# Altium PCB recovery.PcbDoc (part 2 of 2)
Units mm, origin at the board's own origin, x right, y up, seen from the top; angles counter-clockwise.
Board outline 117.35 x 49.91 mm, 2 copper layers (Top Layer, Bottom Layer); 218 components, 132 nets, 666 pads, 35 vias.
Unrouted connection lines stored in the file: 377.
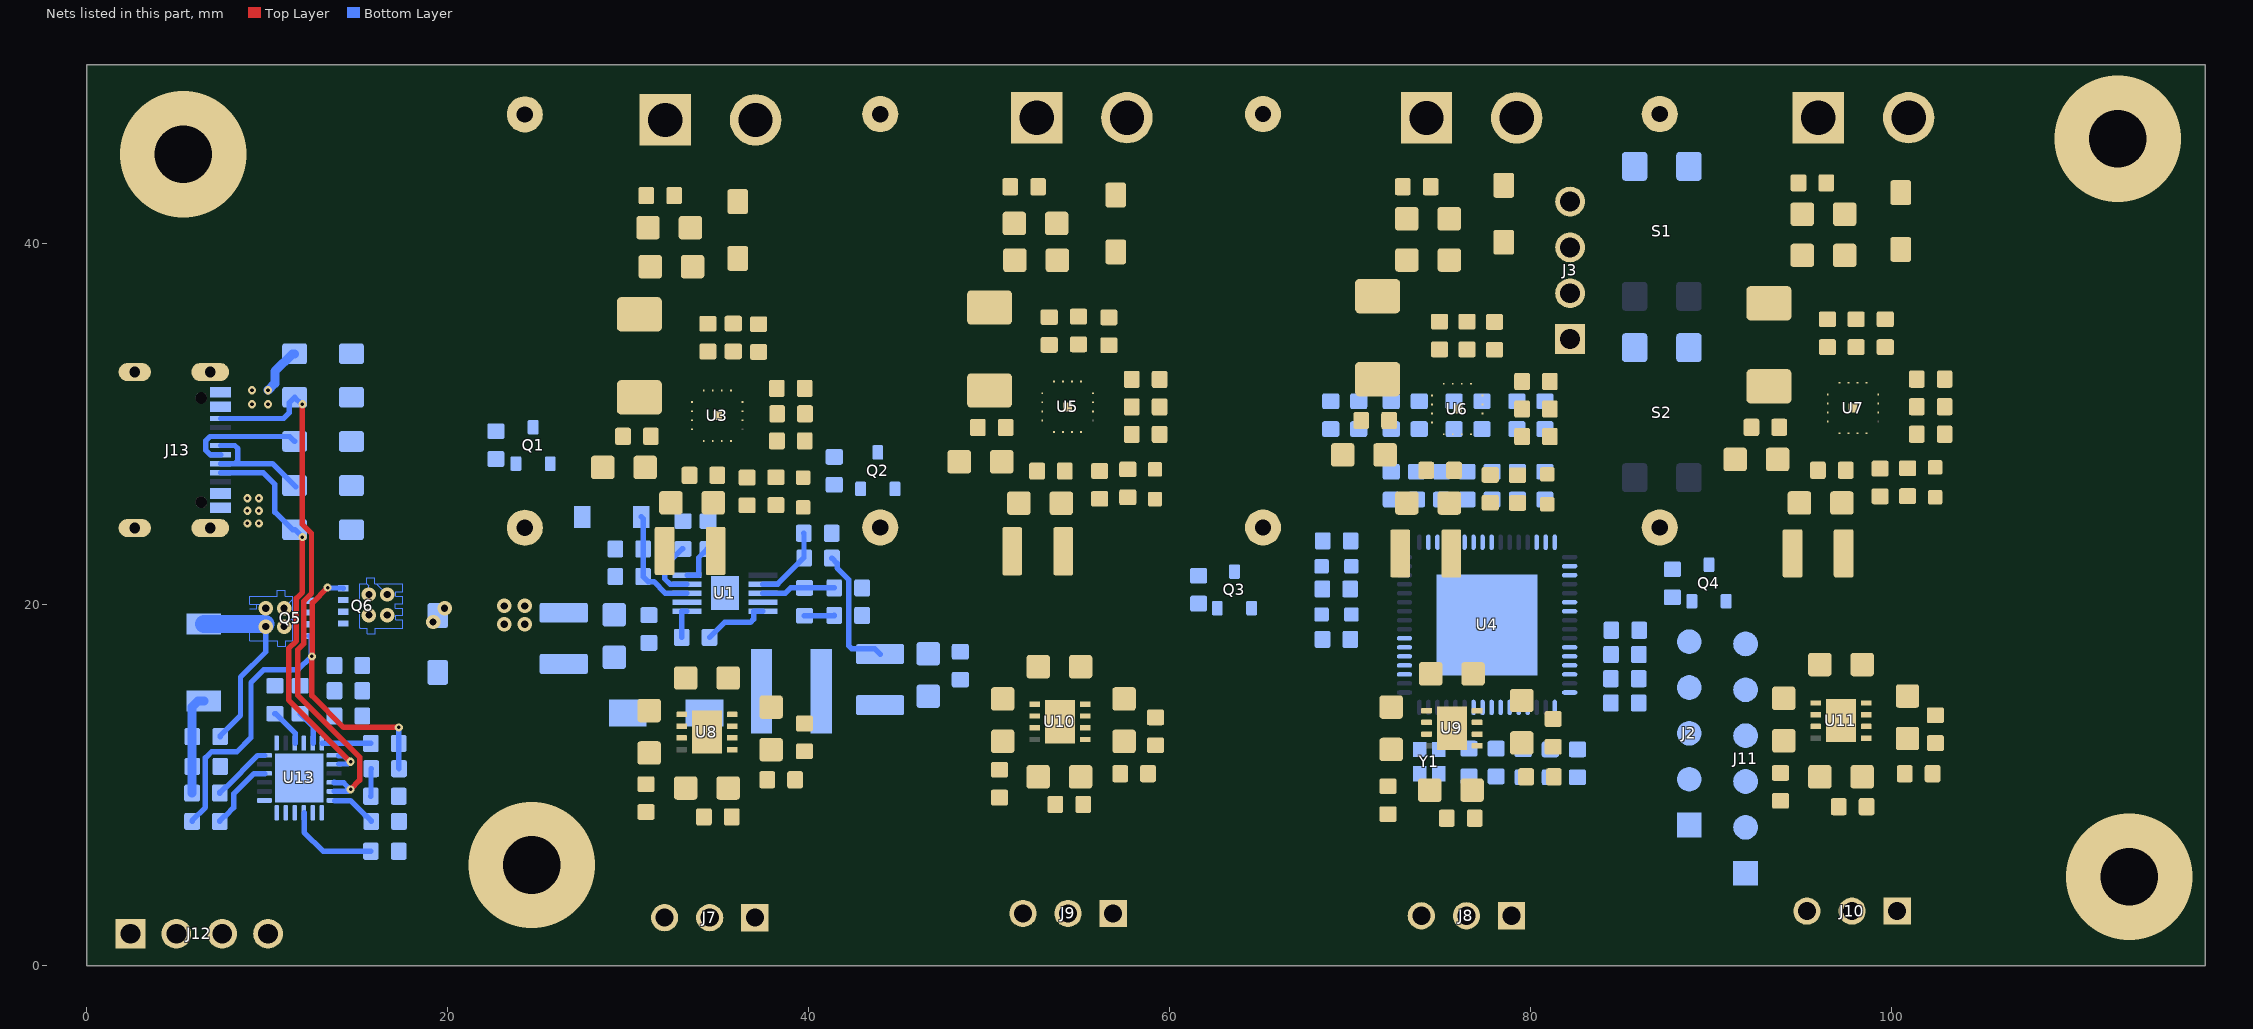
[diagram p2: the nets of this part, all layers, seen from the top]

## Footprints (in the part's own frame and the unit in brackets; to place one, negate y for a bottom-side part, rotate by r counter-clockwise, add the part's x,y. Pads: shape width x height; smd on the part's side, far side on the other; paste and mask are expansions set on the pad) (continued)
TRANS_AONR21321#2 [mm]
  rect 0.6x0.35 smd: 1(-1.55,0.975) 2(-1.55,0.325) 3(-1.55,-0.325) 4(-1.55,-0.975)
  round 0.025 smd: 5(0.558,-0.003)
  Top Layer region: -0.637,-1.231 -0.233,-1.231 -0.233,-1.555 0.209,-1.555 0.209,-1.231 0.209,-1.23 1.749,-1.23 1.749,-0.775 1.352,-0.775 1.352,-0.524 1.748,-0.524 1.748,-0.125 1.346,-0.125 1.346,0.126 1.747,0.126 1.747,0.525 1.352,0.525 1.352,0.772 1.747,0.772 1.753,0.778 1.753,1.225 0.216,1.225 0.216,1.225 0.216,1.55 -0.225,1.55 -0.225,1.225 -0.63,1.225 -0.637,1.218
  Top Layer lines w0.01: -0.127,-0.635 -0.127,-1.125 -0.233,-1.231 ; 0.209,-1.231 0.209,-1.555 -0.233,-1.555 -0.233,-1.231 ; 0.889,-0.635 0.294,-1.23 0.209,-1.23 1.746,-1.23 ; 1.749,-1.23 1.749,-0.775 1.352,-0.775 1.352,-0.524 1.748,-0.524 1.748,-0.125 1.346,-0.125 1.346,0.126 1.747,0.126 1.747,0.525 1.352,0.525 1.352,0.772 1.747,0.772 1.753,0.778 1.753,1.225 0.216,1.225 ; -0.63,1.225 -0.225,1.225 ; -0.63,1.225 -0.637,1.218 -0.637,-1.231 -0.233,-1.231 ; -0.63,1.225 -0.225,1.225 ; -0.225,1.225 -0.225,1.55 0.216,1.55 0.216,1.225 ; 0.216,1.225 0.216,1.225
  silkscreen extent -2.16,-1.55 1.55,1.55, body extent -1.65,-1.55 1.55,1.55, height 0.9
TRANS_SS8050-G [mm]
  rrect25% 0.8x0.6 smd: 1(-1.01,0.95) 2(-1.01,-0.95) 3(1.01,0)
  silkscreen extent -1.4,-1.45 0.65,1.91, body extent -1.2,-1.45 1.2,1.45, height 1.14
XGL5050 [mm]
  rect 1.18x4.7 smd: 1(-1.655,0) 2(1.655,0)
  silkscreen extent -2.64,-2.74 2.64,2.74, body extent -2.64,-2.75 2.64,2.73, height 5.2
XTAL_ECS-240-8-37CKM [mm]
  rect 0.85x0.75 smd paste+0 mask+0.102: 1(-0.675,-0.525) 2(0.675,-0.525) 3(0.675,0.525) 4(-0.675,0.525)
  silkscreen extent -1.8,-0.55 -1.6,-0.35, body extent -1,-0.8 1,0.8, height 0.55

## Part data
C1 C5 C11 C36 C46 C56: library part "Capacitor 22uF 1210", "22uF 50V 1210"
C2 C6 C12 C16 C17 C35 C41 C42 C45 C51 C52 C55 C61 C62 C64 C65 C66 C67 C68 C69 C70 C71 C72 C73 C74 C75 C76 C77 C78 C79: library part "Capacitor 10uF 0805", "10uF 50V 0805"
C3 C4 C7 C8 C9 C10 C13 C19 C21 C34 C39 C44 C49 C54 C59 C80 C85 C89 C90: library part "Capacitor 100nF 0603", "100nF 50V 0603"
  C80 C85 C89 C90: MP=KGF15AR71H104KM
C14 C38 C48 C58: library part "Capacitor 470pF 0603", "470pF 50V 0603"
C15 C37 C47 C57: library part "Capacitor 1nF 0603", "1nF 50V 0603"
C18 C43 C53 C63: library part "Capacitor 220nF 0603", "220nF 50V 0603"
C20 C40 C50 C60: library part "Capacitor 4.7uF 0805", "4.7uF 50V 0805"
C22 C23 C24 C25 C26 C27 C28 C29 C32 C33 C86: library part "Capacitor 1uF 0603", "1uF 50V 0603"
C30 C31: library part "Capacitor 15pF 0603", "15pF 50V 0603", MP=KAM15AR71H103MT
C87 C88: library part "Capacitor 10uF 0603", "10uF 10V 0603"
D1: "1A, 40V, Schottky Rectifier", Package=None, Availability=Unavailable, MP=SS14, Price=None
D2 D4 D5 D6 D8 D10: library part "LED 0603", "1.6x0.8mm Smd Chip Led Lamp", Package="0603 Kingbright", Availability="In Stock", Check_prices=https://www.snapeda.com/parts/KPT-1608ZGC/Kingbright/view-part/?ref=eda, MF=Kingbright, MP=KPT-1608ZGC, Price=None, SnapEDA_Link=https://www.snapeda.com/parts/KPT-1608ZGC/Kingbright/view-part/?ref=snap
D3 D7 D9 D11: "1-channel  50V ultra-low-capacitance IEC ESD protection diode", Package="X1SON-2 Texas Instruments", Availability=Good, DigiKey-Purchase-URL=https://snapeda.com/shop?store=DigiKey&id=383548, MF="Texas Instruments", Mouser-Purchase-URL=https://snapeda.com/shop?store=Mouser&id=383548, MP=TPD1E05U06DPYR, Price=None, SnapEDA_Link=https://www.snapeda.com/parts/TPD1E05U06DPYR/Texas%20Instruments/view-part/383548/?ref=snap, Texas_Instruments-Purchase-URL=https://snapeda.com/shop?store=Texas+Instruments&id=383548
D12: "5A, 40V, Schottky Rectifier", Package="SOD-128-2 Taiwan Semiconductor", Availability="In Stock", Check_prices=https://www.snapeda.com/parts/SS54FSH/Taiwan+Semiconductor/view-part/?ref=eda, MF="Taiwan Semiconductor", MP=SS54FSH, Price=None, SnapEDA_Link=https://www.snapeda.com/parts/SS54FSH/Taiwan+Semiconductor/view-part/?ref=snap
D18 D19 D20 D21: "1-channel  24V ultra-low-capacitance IEC ESD protection diode", Package="X1SON-2 Texas Instruments", Availability=Good, DigiKey-Purchase-URL=https://snapeda.com/shop?store=DigiKey&id=383548, MF="Texas Instruments", Mouser-Purchase-URL=https://snapeda.com/shop?store=Mouser&id=383548, MP=TPD1E05U06DPYR, Price=None, SnapEDA_Link=https://www.snapeda.com/parts/TPD1E05U06DPYR/Texas%20Instruments/view-part/383548/?ref=snap, Texas_Instruments-Purchase-URL=https://snapeda.com/shop?store=Texas+Instruments&id=383548
D22 D23: "1-channel  64V ultra-low-capacitance IEC ESD protection diode", Package="X1SON-2 Texas Instruments", Availability=Good, DigiKey-Purchase-URL=https://snapeda.com/shop?store=DigiKey&id=383548, MF="Texas Instruments", Mouser-Purchase-URL=https://snapeda.com/shop?store=Mouser&id=383548, MP=TPD1E05U06DPYR, Price=None, SnapEDA_Link=https://www.snapeda.com/parts/TPD1E05U06DPYR/Texas%20Instruments/view-part/383548/?ref=snap, Texas_Instruments-Purchase-URL=https://snapeda.com/shop?store=Texas+Instruments&id=383548
J1 J4 J5 J6: "Socket; DC supply; XT30; male; PIN: 2; on PCBs; THT; straight, Colour: yellow", Package=None, Check_prices=https://www.snapeda.com/parts/XT30PW-M/AMASS/view-part/?ref=eda, MF=AMASS, MP=XT30PW-M, SnapEDA_Link=https://www.snapeda.com/parts/XT30PW-M/AMASS/view-part/?ref=snap
J2: library part "5pin 2.54 SAMTEC", "2.54mm", Package=None, Availability=Unavailable, MF="{'manufacturer': 'TE Connectivity'}", MP=534237-4, Price=None
J3 J12: library part "4 pin header", "CONN HEADER VERT 4POS 2.54MM", Manufacturer_Name=SAMTEC, Datasheet Link=http://suddendocs.samtec.com/catalog_english/mtsw.pdf, Geometry.Height=8.64mm, Manufacturer_Part_Number=MTSW-104-07-G-S-000
  J12: MP="4 pin header"
J7 J8 J9 J10: "Connector Header Through Hole 3 position 0.098 (2.50mm)", Package=None, Check_prices=https://www.snapeda.com/parts/B3B-XH-A(LF)(SN)/JST/view-part/?ref=eda, MF="JST Sales", MP=B3B-XH-A(LF)(SN), SnapEDA_Link=https://www.snapeda.com/parts/B3B-XH-A(LF)(SN)/JST/view-part/?ref=snap
J11: library part "6 pin header", "CONN HEADER VERT 6POS 2.54MM", Manufacturer_Name=SAMTEC, Manufacturer_Part_Number=MTSW-104-07-G-S-000, Datasheet Link=http://suddendocs.samtec.com/catalog_english/mtsw.pdf, Geometry.Height=8.64mm, MP="4 pin header"
J13: Package=None, Availability=Unavailable, MF="{'manufacturer': u'GCT'}", MP=USBC-4105-GF-A, Price=None
L1: "10uH Shielded Molded Inductor 2.5 A", Manufacturer_Name=COILCRAFT, Manufacturer_Part_Number=XGL5050-153MEC, Datasheet Link=https://www.coilcraft.com/getmedia/348b2df6-54b3-4579-8737-e8367b6fa367/xgl5050.pdf, Geometry.Height=5.1mm
L2 L3 L4 L5: library part "1uH 9A", "1uH 9A  8.9mΩ"
Q1 Q2 Q3 Q4: "N-Channel 50 V 220mA (Ta) 350mW (Ta) Surface Mount SOT-23-3", Package="SOT-23-3 Motorola", Check_prices=https://www.snapeda.com/parts/BSS138/Onsemi/view-part/?ref=eda, MF=onsemi, MP=BSS138, SnapEDA_Link=https://www.snapeda.com/parts/BSS138/Onsemi/view-part/?ref=snap
Q5 Q6: "P-Channel 40 V 20A Surface", Package="SOT-23-3 Motorola", Check_prices=https://www.snapeda.com/parts/BSS138/Onsemi/view-part/?ref=eda, MF=onsemi, MP=BSS138, SnapEDA_Link=https://www.snapeda.com/parts/BSS138/Onsemi/view-part/?ref=snap
R1 R2 R3 R4 R5 R6 R52: library part "Resistor 100k 0603", "100k 0603"
  R52: MP=RCG0603100KFKEA
R7 R8 R9 R10 R11 R12 R13 R14 R15 R16 R17 R18 R19 R20 R21 R22 R23 R24 R25 R26 R27 R28 R29 R30 R31 R32 R33 R34 R35 R36 R37 R38 R39 R40 R41 R42 R43 R44 R45 R46 R47 R48 R49 R50 R51 R63 R64 R65 R66 R67 R68 R69 R70 R71 R77: library part "Resistor 10k 0603", "10k 0603"
  R77: MP=RE0603FRE1310KL
R53 R54 R59 R60: library part "15R 3W THT", "15R 3W THT"
R55 R56 R61 R62: library part CMP-009-00225-1, "10k 0603", Component Type=Standard, Design Item ID="Resistor 10k 0603", Pins=2, Source=0603.SchLib
R57: library part "Resistor 22.1K 0603", "22.1K 0603"
R58 R79: library part "Resistor 1k 0603", "1k 0603"
R72: library part "Resistor 100R 0603", "100R 0603", Manufacturer_Part_Number=RE0603FRE07100RL, MP=RE0603FRE07100RL
R78: library part "Resistor 470R 0603", "470R 0603"
S1 S2: "Tactile Switch SPST-NO Top Actuated Surface Mount", Package=None, Availability="In Stock", Check_prices=https://www.snapeda.com/parts/TL3305BF160QG/E-Switch/view-part/?ref=eda, MF=E-Switch, MP=TL3305BF160QG, Price=None, Purchase-URL=https://pricing.snapeda.com/search/part/TL3305BF160QG/?ref=eda, SnapEDA_Link=https://www.snapeda.com/parts/TL3305BF160QG/E-Switch/view-part/?ref=snap
U1: "3.5V to 60V Input, 1.5A Step-Down Converter with Eco-Mode 10-HVSSOP -40 to 150", Package="HVSSOP-10 Texas Instruments", Check_prices=https://www.snapeda.com/parts/TPS54160DGQRG4/Texas+Instruments/view-part/?ref=eda, MF="Texas Instruments", MP=TPS54160DGQRG4, SnapEDA_Link=https://www.snapeda.com/parts/TPS54160DGQRG4/Texas+Instruments/view-part/?ref=snap
U2: "Zener Diode 4.7V 500 mW ±2% Surface Mount SOD-123", Package="SOD-123-2 ON Semiconductor", Check_prices=https://www.snapeda.com/parts/SZMMSZ5248CT1G/Onsemi/view-part/?ref=eda, MF="ON Semiconductor", MP=SZMMSZ5248CT1G, SnapEDA_Link=https://www.snapeda.com/parts/SZMMSZ5248CT1G/Onsemi/view-part/?ref=snap
U3 U5 U6 U7: "TI Standalone 17-V, 3A 1-2 cell buck battery charger", Package="WFQFN-16 Texas Instruments", Check_prices=https://www.snapeda.com/parts/BQ25306RTER/Texas+Instruments/view-part/?ref=eda, MF="Texas Instruments", MP=BQ25306RTER, SnapEDA_Link=https://www.snapeda.com/parts/BQ25306RTER/Texas+Instruments/view-part/?ref=snap
U4: "8-bit AVR Microcontroller, 2.7-5.5V, 32KB Flash, 1KB EEPROM, 2KB SRAM, 64-pin MLF, Industrial Grade (-40°C to 85°C)", Code_JEDEC=MO-220-VMMD, ComponentLink1Description="Manufacturer URL", ComponentLink1URL=http://www.atmel.com/, ComponentLink2Description="ATmega329/3290/649/6490 Datasheet", ComponentLink2URL=http://www.atmel.com/dyn/resources/prod_documents/doc2552.pdf, ComponentLink3Description="ATmega329/3290/649/6490 Summary", ComponentLink3URL=http://www.atmel.com/dyn/resources/prod_documents/2552S.pdf, DatasheetVersion="revK, Apr-2011", PackageDescription="64-Pin Micro Lead Frame Package (MLF), 9 x 9 x 1.0 mm Body, 0.5 mm Pitch, 5.40 mm Exposed Pad", PackageReference=64M1, PackageVersion="revH, Oct-2010", RevisionNote="DatasheetVersion & PackageVersion updated. URLs added."
U8 U9 U10 U11: "Voltage Protection with Automatic Cell Balance For 2-Cell Li-Ion Batteries, OVP=4.30V", Package="VSON-8 Texas Instruments", Check_prices=https://www.snapeda.com/parts/BQ29209DRBR/Texas+Instruments/view-part/?ref=eda, MF="Texas Instruments", MP=BQ29209DRBR, SnapEDA_Link=https://www.snapeda.com/parts/BQ29209DRBR/Texas+Instruments/view-part/?ref=snap
U13: "USB Controller USB 2.0 I2C Interface 24-QFN (4x4)", Package="VFQFN-24 STMicroelectronics", Check_prices=https://www.snapeda.com/parts/STUSB4500QTR/STMicroelectronics/view-part/?ref=eda, MF=STMicroelectronics, MP=STUSB4500QTR, SnapEDA_Link=https://www.snapeda.com/parts/STUSB4500QTR/STMicroelectronics/view-part/?ref=snap
Y1: Case\Package=SOT-553-6, Max Operating Temperature="150 degC", Max Supply Voltage="3.3 V", Max Supply Voltage (DC)="6 V", Min Operating Temperature="-55 degC", Min Supply Voltage="1.4 V", Min Supply Voltage (DC)="4 V", Output Current="3 mA", Package Quantity=1, ComponentLink1Description="Manufacturer URL", ComponentLink1URL=http://www.foxonline.com/, ComponentLink2Description=Datasheet, ComponentLink2URL=http://foxonline.com/pdfs/hc49sdlf.pdf, DatasheetVersion=Mar-15, Height="0.55 mm", Interface=I2C, Length="1.6 mm", Mount="Surface Mount", PackageDescription="2-Pin Surface Mount Device, Body 5 x 11.7 mm, Height 4.5 mm", PackageReference=FOX-FOXSDLF160-20, Packaging="Cut Tape", Pins=6, Radiation Hardening=No, REACH SVHC="No SVHC", RoHSCompliant=true, Weight="9.9E-05 oz", Width="1.2 mm"

## Via types
v1: diameter 0.45, hole 0.2, Top Layer to Bottom Layer, 17 vias
v2: diameter 0.8, hole 0.4, Top Layer to Bottom Layer, 14 vias
v3: diameter 7, hole 3.2, Top Layer to Bottom Layer, 4 vias

## Nets (pads, with @x,y where several pads share a name; then routed paths per layer and width w, separated by ;. In a path a pad name is that pad's centre, name@x,y a point inside that pad or via, vN(x,y) a via of type N, cw(c..) or ccw(c..) an arc to the next point about the centre after c; other vN are vias at no path point)
5V: C5.2 C6.2 C7.2 C21.2 C22.2 C23.2 C24.2 J2.4 J3.3 J11.1 J12.2 L1.2 R5.2 R13.1 R16.1 R21.1 R51.2 U4.21 U4.52 U4.62 U4.64 | length 7.2
  Bottom Layer w0.3: R5.2@41.275,22.588 41.56,22.303 41.56,22.045 42.201,21.404 42.201,17.739 42.376,17.563 43.651,17.563 C5.2@43.942,17.272
-BAT1: C11.2 C12.2 C13.2 C16.1 C17.1 C18.1 C19.1 C20.1 C21.1 C22.1 C23.1 C24.1 C26.1 C27.1 C28.1 C29.1 C30.1 C31.1 C32.1 C33.1 C34.2 C35.2 C36.2 C39.1 C40.1 C41.1 C42.1 C43.1 C44.2 C45.2 C46.2 C49.1 C50.1 C51.1 C52.1 C53.1 C54.2 C55.2 C56.2 C59.1 C60.1 C61.1 C62.1 C63.1 C64.1 C65.1 C66.1 C67.1 C68.1 C69.1 C70.1 C71.1 C72.1 C73.1 C74.1 C75.1 C76.1 C77.1 C78.1 C79.1 C85.1 C86.1 C87.1 C88.1 C89.1 C90.1 D3.A D4.2 D5.2 D7.A D9.A D11.A D18.A D19.A D20.A D21.A D22.A D23.A J1.N J2.5 J3.4 J4.N J5.N J6.N J7.1 J8.1 J9.1 J10.1 J11.6 J12.1 J13.A1_B12 J13.B1_A12 J13.SH1 J13.SH2 J13.SH3 J13.SH4 Q1.2 Q2.2 Q3.2 Q4.2 R10.1 R11.1 R12.1 R22.2 R23.2 R24.2 R25.2 R29.1 R30.1 R31.1 R35.1 R36.1 R37.1 R41.1 R42.1 R43.1 R55.2 R56.2 R61.2 R62.2 R77.1 S1.2 S2.2 U3.11 U3.12 U3.17 U4.22 U4.53 U4.63 U4.65 U5.11 U5.12 U5.17 U6.11 U6.12 U6.17 U7.11 U7.12 U7.17 U8.5 U8.6 U8.9 U9.5 U9.6 U9.9 U10.5 U10.6 U10.9 U11.5 U11.6 U11.9 U13.10 U13.12 U13.13 U13.22 U13.25 Y1.2 Y1.4
  other v3: 113.15,4.933 24.638,5.588 5.334,44.958 112.515,45.827
BAT1: C14.2 C16.2 C19.2 C20.2 D3.C J1.P J7.3 L2.2 R7.2 R17.1 R53.2 R63.2 R64.2 U3.10
BAT2: C38.2 C39.2 C40.2 C41.2 D7.C J4.P J9.3 L3.2 R19.1 R26.2 R48.2 R50.2 R54.2 U5.10
BAT3: C48.2 C49.2 C50.2 C51.2 D9.C J5.P J8.3 L4.2 R20.1 R32.2 R44.2 R45.2 R59.2 U6.10
BAT4: C58.2 C59.2 C60.2 C61.2 D11.C J6.P J10.3 L5.2 R18.1 R38.2 R49.2 R60.2 R67.2 U7.10
BTN1: C26.2 R13.2 S1.4 U4.16
BTN2: C27.2 R16.2 S2.4 U4.17
CC1: D18.C J13.A5 U13.1 U13.2 | length 22.6
  Top Layer w0.3: v1(11.938,23.749) 11.938,20.694 11.599,20.355 11.599,18.009 11.176,17.586 11.176,14.732 v1(14.605,11.303)
  Bottom Layer w0.3: J13.A5@7.405,27.325 9.759,27.325 10.414,26.67 10.414,25.139 11.391,24.162 11.525,24.162 v1(11.938,23.749) ; U13.2@13.962,11.182 14.444,11.182 v1@14.564,11.303 ; U13.1@13.962,11.642 14.225,11.642 v1@14.564,11.303 ; v1@14.564,11.303 v1(14.605,11.303) v1@14.564,11.303
CC2: D19.C J13.B5 U13.4 U13.5 | length 31
  Top Layer w0.3: v1(11.938,31.115) 11.938,24.459 12.44,23.957 12.44,20.628 12.001,20.189 12.001,17.843 11.684,17.526 11.684,14.986 15.113,11.557 15.113,10.287 v1(14.605,9.779)
  Bottom Layer w0.3: J13.B5@7.405,30.325 10.894,30.325 11.216,30.647 11.216,31.206 D19.C@11.506,31.496 11.887,31.115 v1(11.938,31.115) ; U13.5@13.692,9.662 14.448,9.662 14.564,9.779 v1(14.605,9.779) 14.582,9.779 14.219,10.142 13.712,10.142 U13.4@13.692,10.162
DATA+: D20.C J13.A6 J13.B6 | length 6.6
  Bottom Layer w0.3: J13.A6@7.405,28.325 6.824,28.325 6.578,28.571 6.578,29.079 6.824,29.325 J13.B6@7.405,29.325 11.232,29.325 D20.C@11.506,29.051
DATA-: D21.C J13.A7 J13.B7 | length 6.6
  Bottom Layer w0.3: J13.B7@7.405,27.825 8.189,27.825 ; J13.A7@7.405,28.825 8.189,28.825 8.365,28.649 8.365,28.001 8.189,27.825 ; D21.C@11.557,26.543 10.275,27.825 8.189,27.825
DCHG: R58.1 U13.9 | length 5.2
  Bottom Layer w0.3: U13.9@12.036,8.472 12.036,7.395 13.081,6.35 R58.1@15.73,6.35
DIS1: Q1.1 R55.1 U4.38
DIS2: Q2.1 R56.1 U4.37
DIS3: Q3.1 R61.1 U4.36
DIS4: Q4.1 R62.1 U4.35
FAN_PWM: J12.3 U4.14
FAN_TACHO: J12.4 R51.1 U4.39
GND1: C1.1 C2.1 C3.1 C5.1 C6.1 C7.1 C8.1 C9.1 C10.1 D1.A R2.1 R3.1 R6.1 U1.9 U1.11 U2.2
MBAT1: J7.2 R65.2 R66.2
MBAT2: J9.2 R68.2 R70.2
MBAT3: J8.2 R46.2 R47.2
MBAT4: J10.2 R69.2 R71.2
MISO: J11.3 U4.13
MOSI: J11.4 U4.12
NetC4_1: C4.1 U1.1 | length 1.7
  Bottom Layer w0.3: C4.1@32.951,18.197 32.951,19.649 U1.1@33.246,19.649
NetC4_2: C4.2 D1.C L1.1 U1.10 | length 3.8
  Bottom Layer w0.3: C4.2@34.493,18.197 35.328,19.032 36.756,19.032 36.931,19.208 36.931,19.649 U1.10@37.446,19.649
NetC8_2: C8.2 U1.4 | length 3.5
  Bottom Layer w0.3: C8.2@33.02,23.096 32.98,23.096 32.004,22.12 32.004,21.445 32.3,21.149 U1.4@33.246,21.149
NetC9_2: C9.2 R4.2 U1.8 | length 4.1
  Bottom Layer w0.3: U1.8@37.446,20.649 38.701,20.649 38.989,20.937 R4.2@39.751,20.937 ; R4.2@39.711,20.937 C9.2@41.402,20.937
NetC10_2: C10.2 R4.1 | length 1.7
  Bottom Layer w0.3: R4.1@39.751,19.395 39.76,19.404 41.393,19.404 C10.2@41.402,19.413
NetC14_1: C14.1 R7.1 R8.2 U3.9
NetC15_1: C15.1 L2.1 U3.13 U3.14
NetC15_2: C15.2 U3.15
NetC17_2: C17.2 U3.16
NetC18_2: C18.2 R9.1 U3.2
NetC25_1: C25.1 J2.1
NetC25_2: C25.2 J11.5 R21.2 U4.20
NetC30_2: C30.2 U4.23 Y1.1
NetC31_2: C31.2 U4.24 Y1.3
NetC37_1: C37.1 L3.1 U5.13 U5.14
NetC37_2: C37.2 U5.15
NetC38_1: C38.1 R26.1 R28.2 U5.9
NetC42_2: C42.2 U5.16
NetC43_2: C43.2 R27.1 U5.2
NetC47_1: C47.1 L4.1 U6.13 U6.14
NetC47_2: C47.2 U6.15
NetC48_1: C48.1 R32.1 R34.2 U6.9
NetC52_2: C52.2 U6.16
NetC53_2: C53.2 R33.1 U6.2
NetC57_1: C57.1 L5.1 U7.13 U7.14
NetC57_2: C57.2 U7.15
NetC58_1: C58.1 R38.1 R40.2 U7.9
NetC62_2: C62.2 U7.16
NetC63_2: C63.2 R39.1 U7.2
NetC64_2: C64.2 R45.1 U9.7
NetC65_2: C65.2 R44.1 U9.1
NetC66_2: C66.2 R46.1 U9.2
NetC67_2: C67.2 U9.4
NetC68_2: C68.2 R50.1 U10.7
NetC69_2: C69.2 R64.1 U8.7
NetC70_2: C70.2 R63.1 U8.1
NetC71_2: C71.2 R65.1 U8.2
NetC72_2: C72.2 U8.4
NetC73_2: C73.2 R67.1 U11.7
NetC74_2: C74.2 R48.1 U10.1
NetC75_2: C75.2 R68.1 U10.2
NetC76_2: C76.2 U10.4
NetC77_2: C77.2 R49.1 U11.1
NetC78_2: C78.2 R69.1 U11.2
NetC79_2: C79.2 U11.4
NetC80_1: C80.1 R72.2 | length 1.5
  Bottom Layer w0.3: C80.1@15.73,9.398 15.739,9.407 15.739,10.913 R72.2@15.748,10.922
NetC85_2: C85.2 C86.2 C87.2 Q5.1 Q5.2 Q5.3 Q6.1 Q6.2 Q6.3 R52.1 U13.24 | length 2.7
  Bottom Layer w0.3: U13.24@13.036,12.332 13.042,12.326 15.723,12.326 R52.1@15.73,12.319
NetC88_2: C88.2 U13.23 | length 1.9
  Bottom Layer w0.3: C88.2@11.811,13.97 12.536,13.245 U13.23@12.536,12.332
NetC89_2: C89.2 U13.21 | length 2.1
  Bottom Layer w0.3: C89.2@10.414,13.97 10.454,13.97 11.536,12.888 U13.21@11.536,12.332
NetC90_2: C90.2 D12.C R78.1 R79.1 | length 5.6
  Bottom Layer w0.5: R79.1@5.824,9.567 5.824,11.134 5.824,12.7 5.824,14.344 6.159,14.679 D12.C@6.477,14.679
NetD2_1: D2.1 R9.2
NetD2_2: D2.2 U3.3
NetD4_1: D4.1 R14.1
NetD5_1: D5.1 R15.1
NetD6_1: D6.1 R27.2
NetD6_2: D6.2 U5.3
NetD8_1: D8.1 R33.2
NetD8_2: D8.2 U6.3
NetD10_1: D10.1 R39.2
NetD10_2: D10.2 U7.3
NetJ2_2: J2.2 U4.3
NetJ2_3: J2.3 U4.2
NetQ1_3: Q1.3 R53.1
NetQ2_3: Q2.3 R54.1
NetQ3_3: Q3.3 R59.1
NetQ4_3: Q4.3 R60.1
NetQ5_4: Q5.4 Q6.4 R52.2 R57.1 R72.1 | length 30.1
  Top Layer w0.3: v1(12.461,17.145) 12.461,14.971 14.224,13.208 v1(17.272,13.208) ; v1@12.469,17.194 12.489,17.214 12.489,20.109 v1(13.335,20.955)
  Bottom Layer w0.3: R57.1@5.824,8.001 5.824,8.041 6.565,8.782 6.565,11.517 6.697,11.649 6.908,11.86 8.304,11.86 9.089,12.645 9.089,15.693 9.801,16.405 11.706,16.405 12.404,17.103 v1@12.404,17.161 ; Q5.4@12.319,18.273 12.407,18.273 12.432,18.248 12.432,17.174 v1(12.461,17.145) ; v1(13.335,20.955) 13.356,20.934 14.178,20.934 Q6.4@14.198,20.914 ; v1(17.272,13.208) R52.2@17.272,12.319 17.281,12.31 17.281,10.931 R72.1@17.29,10.922
NetR1_1: R1.1 R2.2 U1.3 U2.1 | length 6.2
  Bottom Layer w0.3: U2.1@30.718,24.874 30.815,24.777 30.815,22.842 R1.1@30.815,21.566 ; R1.1@30.815,21.572 R1.1@30.815,21.566 ; U1.3@33.246,20.649 32.038,20.649 31.406,21.281 31.1,21.281 31.029,21.352 30.886,21.494 R1.1@30.815,21.566
NetR3_2: R3.2 U1.5 | length 2.3
  Bottom Layer w0.3: U1.5@33.246,21.649 33.896,21.649 33.896,22.615 34.377,23.096 R3.2@34.417,23.096
NetR5_1: R5.1 R6.2 U1.7 | length 4.2
  Bottom Layer w0.3: U1.7@37.446,21.149 38.263,21.149 39.725,22.611 39.725,23.955 R6.2@39.717,23.963
NetR8_1: R8.1 U3.8
NetR10_2: R10.2 U3.6
NetR11_2: R11.2 U3.4
NetR12_2: R12.2 U3.7
NetR14_2: R14.2 U4.51
NetR15_2: R15.2 U4.50
NetR28_1: R28.1 U5.8
NetR29_2: R29.2 U5.6
NetR30_2: R30.2 U5.4
NetR31_2: R31.2 U5.7
NetR34_1: R34.1 U6.8
NetR35_2: R35.2 U6.6
NetR36_2: R36.2 U6.4
NetR37_2: R37.2 U6.7
NetR40_1: R40.1 U7.8
NetR41_2: R41.2 U7.6
NetR42_2: R42.2 U7.4
NetR43_2: R43.2 U7.7
NetR47_1: R47.1 U9.3
NetR66_1: R66.1 U8.3
NetR70_1: R70.1 U10.3
NetR71_1: R71.1 U11.3
NetR79_2: R79.2 U13.18 | length 3.4
  Bottom Layer w0.3: R79.2@7.366,9.567 7.366,9.607 7.651,9.892 7.691,9.892 9.451,11.652 U13.18@9.856,11.652
SCK: J11.2 U4.11
SCL: J3.1 U4.6 U13.7
SDA: J3.2 U4.7 U13.8
SENSE1: C28.2 R17.2 R22.1 U4.57
SENSE2: C29.2 R19.2 R24.1 U4.56
SENSE3: C32.2 R20.2 R25.1 U4.55
SENSE4: C33.2 R18.2 R23.1 U4.54
USB_ALRT: U4.25 U13.19
USB_ATTACH: U4.26 U13.11
USB_RST: R77.2 U13.6 | length 2.5
  Bottom Layer w0.3: U13.6@13.716,9.152 14.597,9.152 15.423,8.326 15.463,8.326 15.748,8.041 R77.2@15.748,8.001
VB_USB-C: D12.A D22.C J13.A4_B9 J13.B4_A9 Q5.5 R78.2 | length 13.3
  Bottom Layer w0.3: R78.2@7.379,12.7 7.379,12.74 8.509,13.87 8.509,16.002 9.906,17.399 9.906,18.473 9.906,18.669 v2(9.906,18.796)
  Bottom Layer w0.5: v1(10.033,31.89) 10.414,32.271 10.414,32.932 11.391,33.909 D22.C@11.506,33.909
  Bottom Layer w1: D12.A@6.477,18.929 v2@9.894,18.929
  other v1: 8.89,24.511 9.525,24.511 8.89,25.209 9.525,25.209 8.89,25.908 9.525,25.908 9.144,31.115 10.033,31.115 9.144,31.89
  other v2: 10.922,18.796 9.906,19.812 10.922,19.812
VBUS: C1.2 C2.2 C3.2 C11.1 C12.1 C13.1 C34.1 C35.1 C36.1 C44.1 C45.1 C46.1 C54.1 C55.1 C56.1 C80.2 D23.C Q6.5 R1.2 R58.2 U1.2 U3.1 U5.1 U6.1 U7.1
  other v2: 23.114,18.923 24.257,18.923 19.177,19.05 15.621,19.431 16.637,19.431 19.812,19.812 23.114,19.939 24.257,19.939 15.621,20.574 16.637,20.574
VBUS_C_EN: R57.2 U13.16 | length 4.1
  Bottom Layer w0.3: R57.2@7.366,8.001 7.366,8.041 7.651,8.326 7.691,8.326 8.128,8.763 8.128,9.525 9.255,10.652 U13.16@9.856,10.652
pads on no net: J13. J13.A8 J13.B8 S1.1 S1.3 S2.1 S2.3 U1.6 U3.5 U4.1 U4.4 U4.5 U4.8 U4.9 U4.10 U4.15 U4.18 U4.19 U4.27 U4.28 U4.29 U4.30 U4.31 U4.32 U4.33 U4.34 U4.40 U4.41 U4.42 U4.43 U4.44 U4.45 U4.46 U4.47 U4.48 U4.49 U4.58 U4.59 U4.60 U4.61 U5.5 U6.5 U7.5 U8.8 U9.8 U10.8 U11.8 U13.3 U13.14 U13.15 U13.17 U13.20

## Polygon pours and split planes (outlines as drawn)
NetC85_2 on Bottom Layer "NETC85_2_L02_P009" (solid, pour order 9): 12.827,11.938 14.224,11.938 14.224,18.288 14.732,18.796 14.732,20.574 11.811,20.574 11.811,18.669 12.827,18.669 12.827,12.192
VB_USB-C on Bottom Layer "VB_USB-C_L02_P007" (solid, pour order 7): 6.858,30.734 6.858,31.242 8.382,31.242 8.763,31.623 8.763,32.258 10.414,32.258 10.414,30.734
VB_USB-C on Bottom Layer "VB_USB-C_L02_P006" (solid, pour order 6): 6.825,25.878 6.825,26.469 9.726,26.469 9.906,26.289 9.906,24.13 8.509,24.13 8.509,25.654 8.285,25.878
5V on Bottom Layer "5V_L02_P004" (solid, pour order 4): 40.005,12.809 41.275,12.809 41.275,14.714 43.053,16.492 49.149,16.492 49.149,18.143 40.005,18.143
NetC4_2 on Bottom Layer "NETC4_2_L02_P003" (solid, pour order 3): 38.227,19.794 36.576,19.794 36.576,15.476 35.941,14.841 33.147,14.841 33.147,13.19 33.528,12.809 38.227,12.809
VBUS on Bottom Layer "VBUS_L02_P002" (solid, pour order 2): 34.037,20.302 34.036,20.301 34.036,20.003 32.467,20.003 31.133,18.669 22.479,18.669 22.479,20.302 34.036,20.302
-BAT1 on Bottom Layer "-BAT1_L02_P001" (solid, pour order 1): 0,0 0,49.911 117.348,49.911 117.348,0
VBUS on Top Layer "VBUS_L01_P010" (solid, pour order 10): 98.933,21.336 14.986,21.336 14.986,18.288 98.933,18.288
VB_USB-C on Top Layer "VB_USB-C_L01_P005" (solid, pour order 5): 8.509,32.258 11.557,32.258 11.557,23.622 11.557,18.161 8.509,18.161
-BAT1 on Top Layer "-BAT1_L01_P000" (solid, pour order 0): 0,0 0,49.911 117.348,49.911 117.348,0

## Other copper
Bottom Layer:
  rectangle net VBUS: 34.036,20.003 34.037,20.302

## Text inside footprints (layer, text, board x,y; h text height)
J13: Mechanical 13 "PCB EDGE" at 0.15,33.975 h0.41 r270